# Altium PCB LED Chaser.PcbDoc
Units mm, origin at the board's own origin, x right, y up, seen from the top; angles counter-clockwise.
Board outline 64 x 48.5 mm, 2 copper layers (Top Layer, Bottom Layer), stack 1.1 mm thick; 19 components, 17 nets, 61 pads, 20 vias.
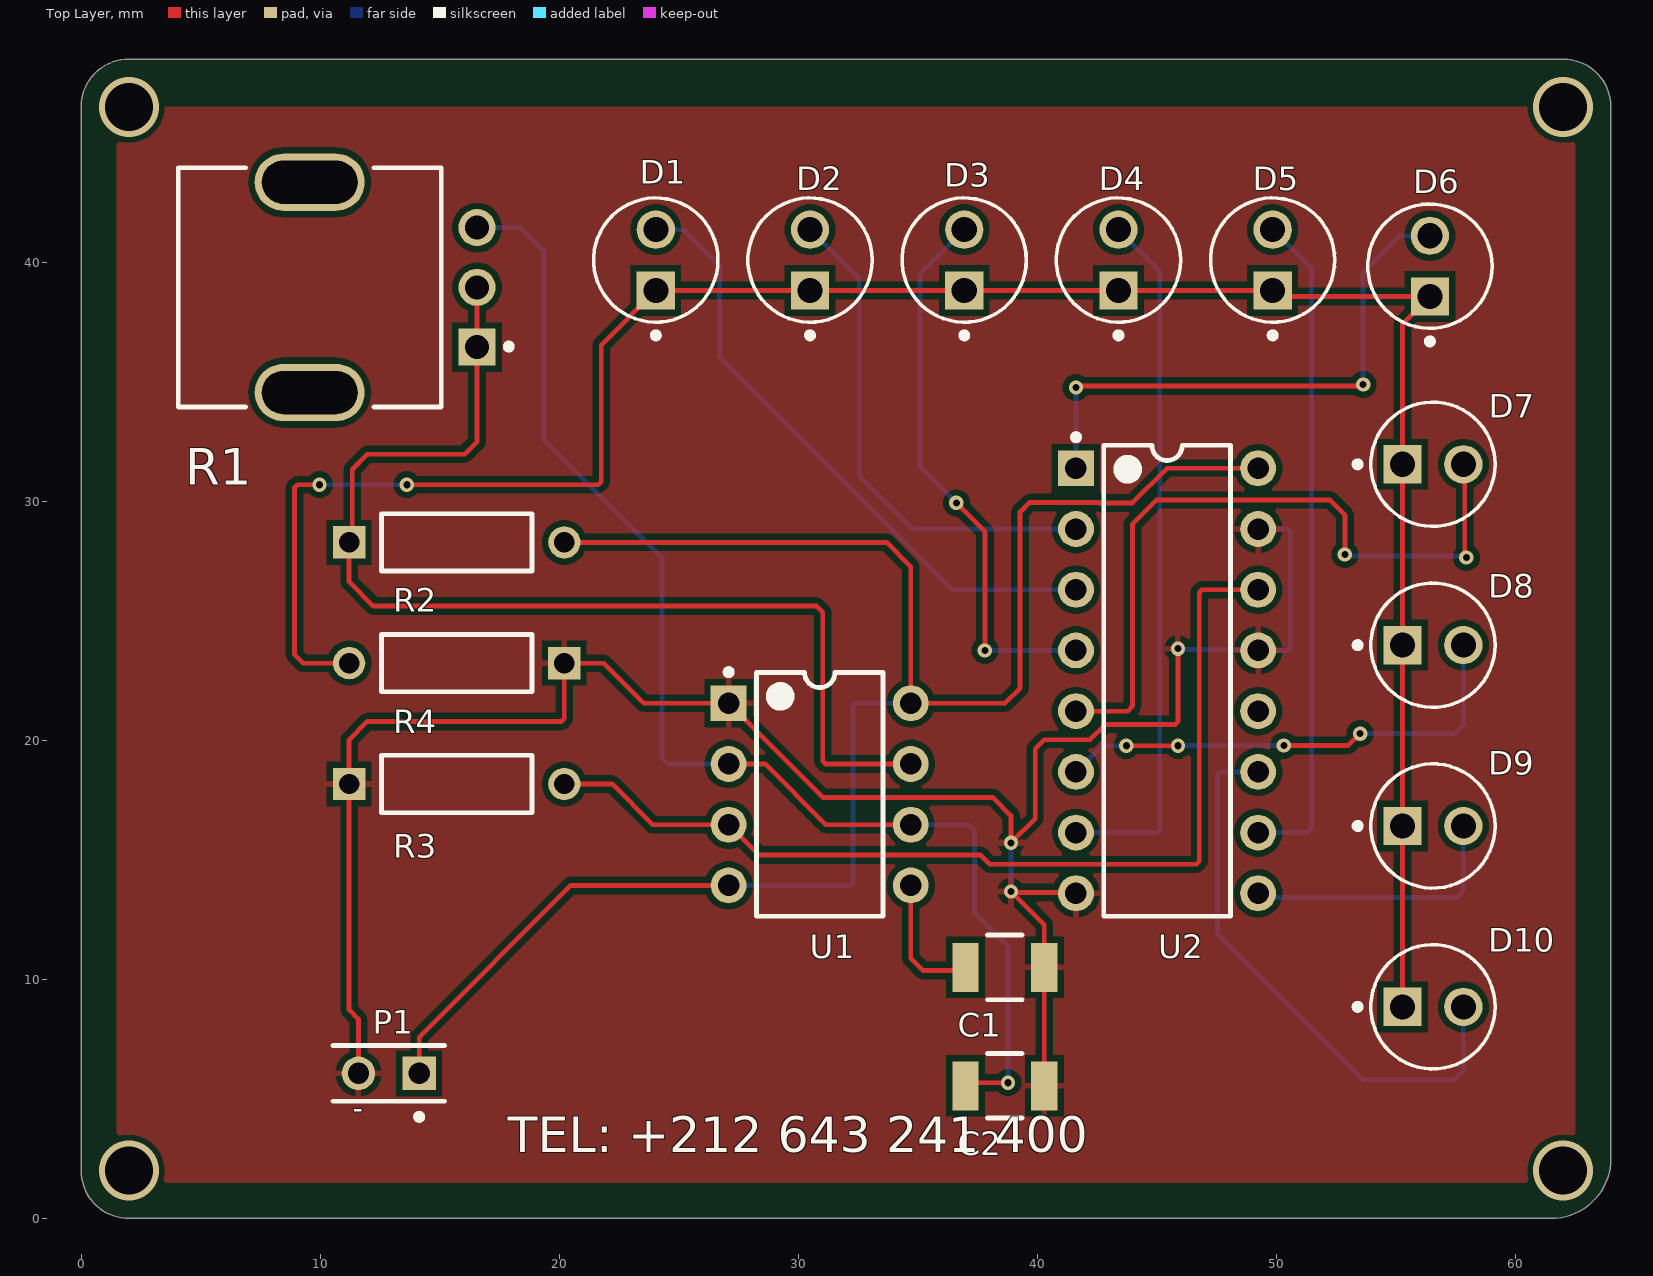
[diagram p0: Top Layer view]
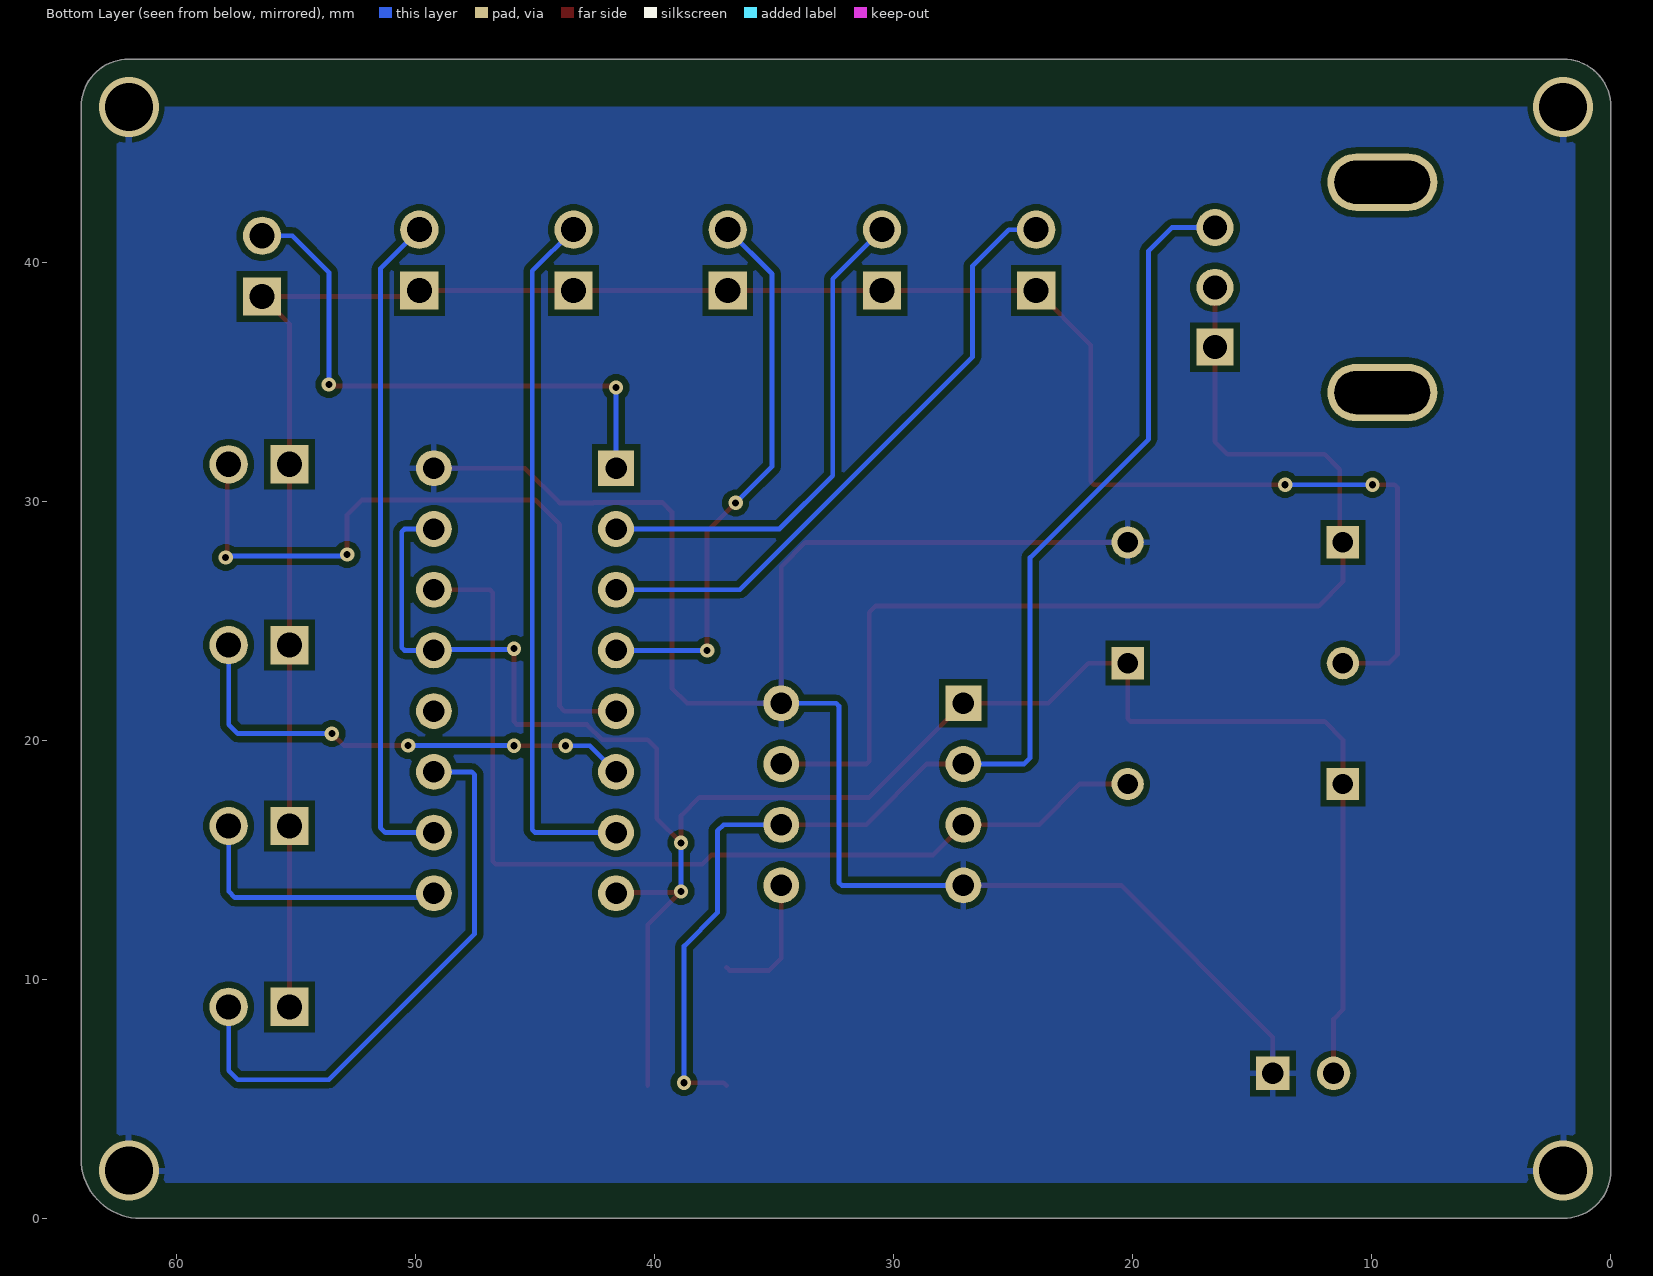
[diagram p1: Bottom Layer view, seen from below]
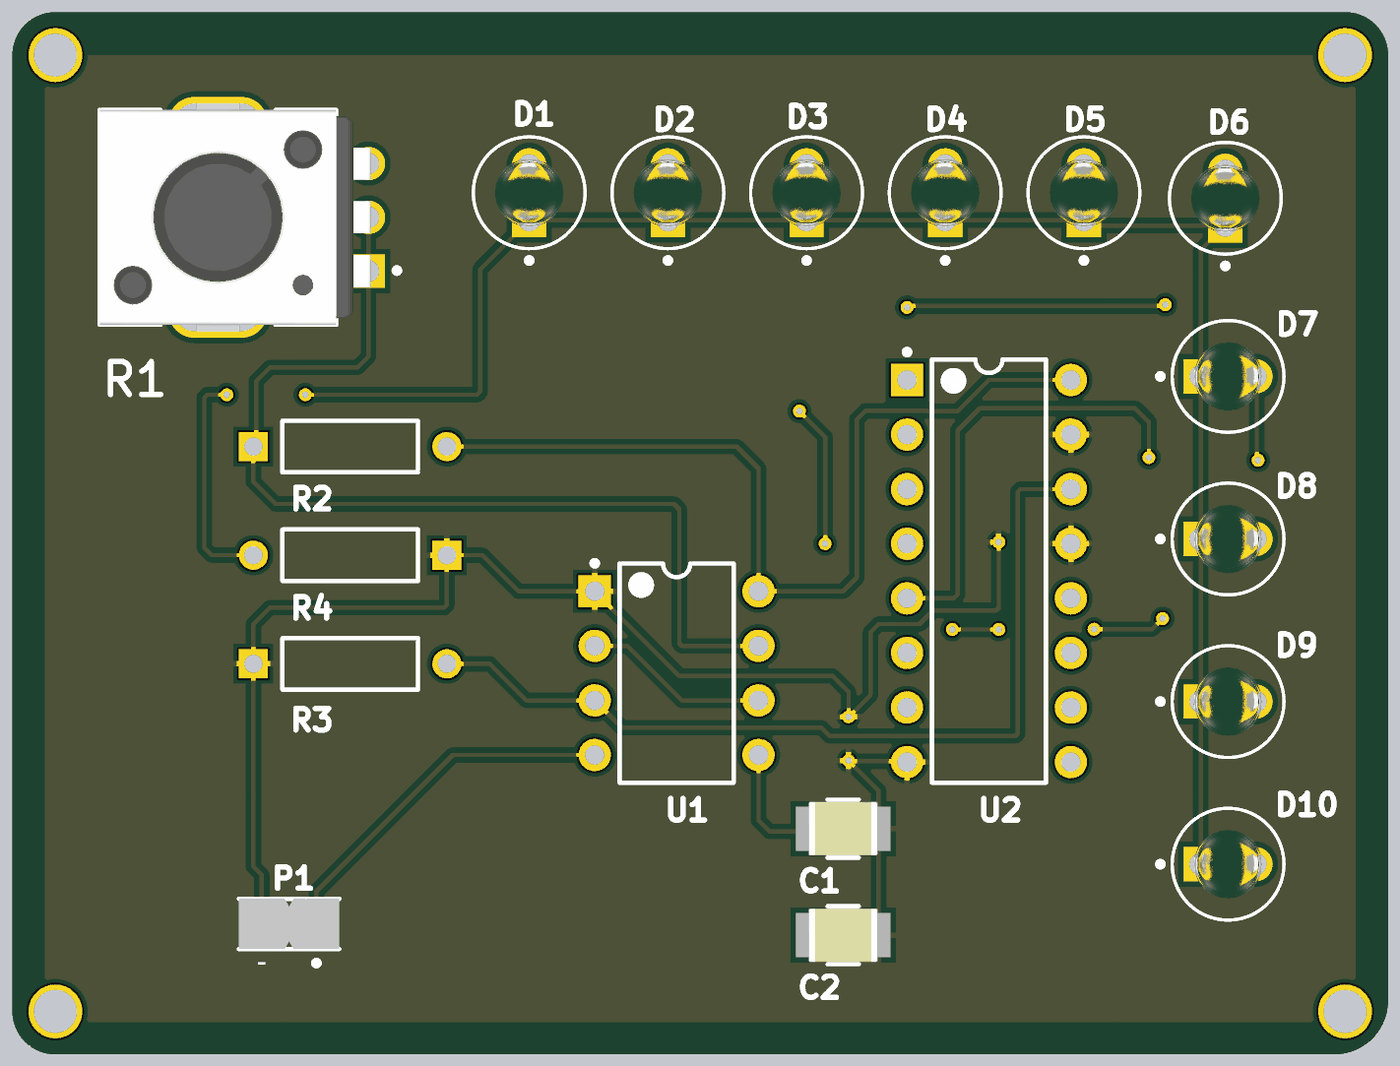
[diagram p2: 3D render of the assembled board from above, using the file's embedded part models]

## Layer stack, top to bottom
Top Solder: solder mask 0.05, SM-002, Dk 4
Top Layer: signal copper 0.1
Dielectric 1: dielectric 0.9, FR-4, Dk 4.8
Bottom Layer: signal copper 0.1
Bottom Solder: solder mask 0.05, SM-002, Dk 4

## Board outline
0,2 0,46.5 cw(c2,46.5) 2,48.5 62,48.5 cw(c62,46.5) 64,46.5 64,2.5 cw(c61.5,2.5) 61.5,0 2,0 cw(c2,2)

## Design rules (kind name [scope] priority, off if disabled: settings)
Clearance [All] p1: gap=0.254 ignorepadtopadclearanceinfootprint=FALSE ismatrix=TRUE
PolygonConnect [All] p1: connectstyle=Relief reliefconductorwidth=0.254 reliefentries=4 polygonreliefangle="90 Angle" airgapwidth=0.254
RoutingVias RoutingViaStyle_1 [All] p1: holewidth=0.4 width=0.5 viastyle="Through Hole" minholewidth=0.4 minwidth=0.5 maxholewidth=0.4 maxwidth=0.5
RoutingVias [All] p2: holewidth=0.711 width=1.27 viastyle="Through Hole" minholewidth=0.711 minwidth=1.27 maxholewidth=0.711 maxwidth=1.27
SolderMaskExpansion [All] p1: expansion=0.102 istentingtop=FALSE
Width PowerWidth [(InNet('VCC') OR InNet('GND'))] p1: maxlimit=0.5 minlimit=0.3 preferedwidth=0.4 minimp=50.000000 maximp=50.000000 favimp=50.000000
Width MaxMinWidth_1 [All] p2: maxlimit=0.2 minlimit=0.1 preferedwidth=0.2 minimp=50.000000 maximp=50.000000 favimp=50.000000
Width [All] p3: maxlimit=0.254 minlimit=0.254 preferedwidth=0.254
30 further rules are at their usual default settings.

## Components (designator, comment, footprint, x,y, rotation, side; value= is the part's Value field where it differs from the comment)
C1 "GRM32ER60J107ME20L" FP-GRM32-0_3-MFG 38.648,5.549 r0 top value=100uF
C2 "GRM32ER60J107ME20L" FP-GRM32-0_3-MFG 38.648,10.502 r0 top value=100uF
D1 "TLHR4400" FP-6_544-5255_01-4-MFG 24.043,40.093 r90 top
D2 "TLHR4400" FP-6_544-5255_01-4-MFG 30.495,40.093 r90 top
D3 "TLHR4400" FP-6_544-5255_01-4-MFG 36.946,40.093 r90 top
D4 "TLHR4400" FP-6_544-5255_01-4-MFG 43.398,40.093 r90 top
D5 "TLHR4400" FP-6_544-5255_01-4-MFG 49.849,40.093 r90 top
D6 "TLHR4400" FP-6_544-5255_01-4-MFG 56.428,39.839 r90 top
D7 "TLHR4400" FP-6_544-5255_01-4-MFG 56.555,31.548 r0 top
D8 "TLHR4400" FP-6_544-5255_01-4-MFG 56.555,23.982 r0 top
D9 "TLHR4400" FP-6_544-5255_01-4-MFG 56.555,16.417 r0 top
D10 "TLHR4400" FP-6_544-5255_01-4-MFG 56.555,8.851 r0 top
P1 "5-146280-2" TECO-5-146280-2_V 12.874,6.069 r180 top
R1 "PTV09A-4225F-B103" FP-PTV09A-4-MFG 9.565,38.95 r90 top
R2 "MFR-25FBF52-1M" RESA60-630X240 15.714,28.282 r0 top
R3 "MFR-25FBF52-1M" RESA60-630X240 15.714,18.175 r0 top
R4 "MFR-25FBF52-1M" RESA60-630X240 15.714,23.228 r180 top
U1 "NE555P" P0008A 30.901,17.741 r0 top
U2 "CD74HC4017E" N0016A 45.432,22.491 r0 top

## Footprints (in the part's own frame and the unit in brackets; to place one, negate y for a bottom-side part, rotate by r counter-clockwise, add the part's x,y. Pads: shape width x height; smd on the part's side, far side on the other; paste and mask are expansions set on the pad)
FP-6_544-5255_01-4-MFG [mm]
  rect 1.6x1.6 hole 1.05 paste-2539.97 mask+0: 1(-1.27,0)
  round 1.6 hole 1.05 paste-2539.97 mask+0: 2(1.27,0)
  silkscreen extent -3.27,-2.6 2.6,2.6, body extent -2.32,-2.32 2.32,2.32, height 0.25
FP-GRM32-0_3-MFG [mm]
  rect 1.1x2.05 smd paste+0 mask+0: 1(-1.65,0) 2(1.65,0)
  silkscreen extent -0.72,-1.35 0.72,1.35, body extent -2.3,-1.45 2.3,1.45, height 0.25
FP-PTV09A-4-MFG [mm]
  rect 1.55x1.55 hole 1 paste-2539.97 mask+0: 1(-2.5,-7)
  round 1.55 hole 1 paste-2539.97 mask+0: 2(0,-7) 3(2.5,-7)
  rrect100% 2.4x4.6 hole 4 slot 1.8 at 0 deg paste-2539.97 mask+0: 4(-4.4,0) 5(4.4,0)
  silkscreen extent -5,-8.45 5,5.5, body extent -5.8,-7.88 5.8,5.6, height 0.25
N0016A [mm] "DIP, 16-Leads, Body 19.7x6.6mm, Pitch 2.54mm"
  rect 1.5x1.5 hole 0.9: 1(-3.81,8.89)
  round 1.5 hole 0.9: 2(-3.81,6.35) 3(-3.81,3.81) 4(-3.81,1.27) 5(-3.81,-1.27) 6(-3.81,-3.81) 7(-3.81,-6.35) 8(-3.81,-8.89) 9(3.81,-8.89) 10(3.81,-6.35) 11(3.81,-3.81) 12(3.81,-1.27) 13(3.81,1.27) 14(3.81,3.81) 15(3.81,6.35) 16(3.81,8.89)
  silkscreen extent -3.93,-9.85 2.65,10.31, body extent -3.95,-9.85 3.95,9.85, height 5.08
P0008A [mm] "DIP, 8-Leads, Body 10.15x6.6mm, Pitch 2.54mm"
  rect 1.5x1.5 hole 0.9: 1(-3.81,3.81)
  round 1.5 hole 0.9: 2(-3.81,1.27) 3(-3.81,-1.27) 4(-3.81,-3.81) 5(3.81,-3.81) 6(3.81,-1.27) 7(3.81,1.27) 8(3.81,3.81)
  silkscreen extent -3.93,-5.1 2.65,5.23, body extent -3.95,-5.07 3.95,5.07, height 5.08
RESA60-630X240 [mm] "Axial Resistor, 2-Leads, Dia 2.4mm, Body Length 6.3mm"
  rect 1.35x1.35 hole 0.85: 1(-4.5,0)
  round 1.35 hole 0.85: 2(4.5,0)
  silkscreen extent -3.15,-1.2 3.15,1.2, body extent -3.15,-1.2 3.15,1.2, height 2.4
TECO-5-146280-2_V [mm] "Connector, 2-Leads, Body 4.67x2.34mm, Pitch 2.54mm"
  rect 1.4x1.4 hole 0.89: 1(-1.27,0)
  round 1.4 hole 0.89: 2(1.27,0)
  silkscreen extent -2.33,-1.17 2.33,1.94, body extent -2.34,-1.17 2.34,1.17, height 5.33

## Part data
C1: library part CMP-2000-05259-2, "CAP CER 100UF 6.3V X5R 1210", 3DS Part Number=220-00002, Capacitance=100uF, Manufacturer=Murata, Package=GRM32-0.3, Temperature="-55°C to +85°C", Temperature Characteristic=X5R, Temperature Coefficient=15%, Temperature Range High=+85°C, Temperature Range Low=-55°C, Tolerance=20%, Voltage=6.3V, Automotive=No, Category=Cap, ComponentLink2Description=Datasheet, ComponentLink2URL=https://search.murata.co.jp/Ceramy/image/img/A01X/G101/ENG/GRM32ER60J107ME20-01.pdf, Device Class L1="Passive Components", Device Class L2=Capacitors, Device Class L3="Ceramic Capacitors", Digikey Description="CAP CER 100UF 6.3V X5R 1210", Height=2.7mm, Ipc Land Pattern Name=CAPC320250X250, Lead Free=Yes, Manufacturer Part Number=GRM32ER60J107ME20L, Material=Ceramic, Octopart=https://octopart.com/grm32er60j107me20l-murata-197007, RoHS=TRUE, Voltage Rating=6.3V
C2: library part CMP-2000-05259-2, "CAP CER 100UF 6.3V X5R 1210", 3DS Part Number=220-00002, Capacitance=10nF, Manufacturer=Murata, Package=GRM32-0.3, Temperature="-55°C to +85°C", Temperature Characteristic=X5R, Temperature Coefficient=15%, Temperature Range High=+85°C, Temperature Range Low=-55°C, Tolerance=20%, Voltage=6.3V, Automotive=No, Category=Cap, ComponentLink2Description=Datasheet, ComponentLink2URL=https://search.murata.co.jp/Ceramy/image/img/A01X/G101/ENG/GRM32ER60J107ME20-01.pdf, Device Class L1="Passive Components", Device Class L2=Capacitors, Device Class L3="Ceramic Capacitors", Digikey Description="CAP CER 100UF 6.3V X5R 1210", Height=2.7mm, Ipc Land Pattern Name=CAPC320250X250, Lead Free=Yes, Manufacturer Part Number=GRM32ER60J107ME20L, Material=Ceramic, Octopart=https://octopart.com/grm32er60j107me20l-murata-197007, RoHS=TRUE, Voltage Rating=6.3V
D1 D2 D3 D4 D5 D6 D7 D8 D9 D10: library part CMP-00030-55433986-1, "TLHR4400 LED; Red; 3mcd; 3mmDia.; T-1; 30mA; 2V; 635nm; +/-30deg; GaAsP on GaP; 15V; 100mW", Case/Package=T, Color=Red, Forward Current=10mA, Forward Voltage=2V, Max Operating Temperature=100°C, Min Operating Temperature=-40°C, Power Dissipation=100mW, Reverse Voltage=15V, Depth=3.2mm, Diameter=3mm, Dominant Wavelength=625nm, Height=6.1mm, Illumination Color=Red, Length=3.2mm, Lens Size=3mm, Lens Style="Circular, Colored, Diffused, Dome, Round", Lens Transparency=Diffused, Luminous Intensity=3mcd, Mount="PCB, Through Hole", NexarPartId=55433986, Number of Elements=1, Number of LEDs=1, Number of Pins=2, Packaging=Bulk, Radiation Hardening=No, REACH SVHC=Unknown, RoHS=Compliant, Schedule B="8541402000, 8541402000", Test Current=10mA, Viewing Angle=30°, Wavelength=625nm
P1: library part CMP-2000-07492-1, "Male Header, Pitch 2.54 mm, 1 x 2 Position, Height 8.21 mm, Tail Length 3.05 mm, -65 to 105 degC, RoHS, Bulk", Case\/Package=100, Colour=Black, Current Rating=3A, Flammability Rating=UL94V-0, High Temperature Housing=Yes, Manufacturer="TE Connectivity", Max Current Rating=5A, Max Operating Temperature=105degC, Min Operating Temperature=-65degC, Package Description="Male Header, Pitch 2.54 mm, 1 x 2 Position, Height 8.21 mm, Tail Length 3.05 mm", Package Quantity=500, Approvals=CSA, Board Standoff=No(Without), Connector Type=Header, Contact Gender=Male, Contact Material=CopperAlloy, Contact Mating Length=0.23inch, Contact Plating=Matte, Contact Protection=No(Without), Contact Shape=Square, Datasheet URL=http://www.te.com/commerce/DocumentDelivery/DDEController?Action=showdoc&DocId=Customer+Drawing%7F146280%7FH1%7Fpdf%7FEnglish%7FENG_CD_146280_H1.pdf%7F5-146280-2, Datasheet Version="Rev. H1, 08/2016", Depth=2.34mm, Gasket=No(Without), High Speed Serial Data Connector=No, Housing Colour=Black, Housing Material=Polymer, Keyed=No, Length=4.67mm, Manufacturer URL=http://www.te.com/, Mating Alignment=No(Without), Mating Connector Lock=No(Without), Mating Post Length=0.23inch, Mount=ThroughHole, Mounting Technology=ThroughHole, Number of Contacts=2, Number of Positions=2, Number of Rows=1, Orientation=Straight, Package Reference=5-146280-2, Packaging=Carton, Panel Mount Retention=No(Without), PCB Mount Retention=Without, PCB Mounting Orientation=Vertical, PCB Thickness=0.063inch, Pitch=2.54mm, Radiation Hardening=No, RoHSCompliant=true, Row Spacing=2.54mm, Selectively Loaded=No(Without), Stabilizers=No(Without), Termination=ThroughHole, Termination Post Length=0.12inch
R1: library part CMP-07234-000052-1, "POT 10K OHM 1/20W CARBON LINEAR", Max Operating Temperature=50°C, Max Power Dissipation=50mW, Min Operating Temperature=-10°C, Package Quantity=100, Resistance=10kR, Resistance Tolerance=20%, Resistor Type=Carbon, Actuator Diameter=0.236inch, Actuator Length=0.984inch, Depth=12.5mm, Height=12.5mm, Hole Diameter=9.1mm, Length=11.4mm, Military Standard=Not, Mount="Through Hole", Number of Gangs=1, Number of Turns=1, Packaging=Bulk, Power Rating=50mW, Radiation Hardening=No, REACH SVHC="No SVHC", RoHS Compliant=Yes, Series="Pro Audio PTV09", Taper=Linear, Technology="CARBON FILM", Termination=PCB, Tolerance=20%, Type=Potentiometer
R2 R3 R4: library part CMP-1659-00070-1, "Axial Resistor, 1 MOhm, +/- 1%, 250 mW, -55 to 155 degC, 2-Pin THD, RoHS, Bulk", Case\Package=Axial, Max Operating Temperature="155 degC", Min Operating Temperature="-55 degC", Package Quantity=200, Power Rating="250 mW", Resistance="1M Ohm", Tolerance=1%, Voltage Rating="250 V", ComponentLink1Description="Manufacturer URL", ComponentLink1URL=http://www.yageo.com/, ComponentLink2Description=Datasheet, ComponentLink2URL=http://www.yageo.com/documents/recent/Yageo%20LR_MFR_2013.pdf, DatasheetVersion=Apr-13, Length="0.248 inch", Mount="Through Hole", PackageDescription="2-Pin Axial Lead, Dia 2.4 mm, Body Length 6.3 mm", PackageReference=MFR-25, Packaging=Bulk, RoHSCompliant=true
U1: library part CMP-2000-04954-1, "Precision Timer, 4.5 to 16 V, 0 to 70 degC, 8-Pin DIP, Pb-Free, Tube", Manufacturer=TexasInstruments, Maximum High Level Output Current=-200mA, Maximum Low Level Output Current=200mA, Operating Supply Voltage=5, Package=8PDIP, Package Description="8-Pin Double In-line Package, Body 9.59 x 6.35 mm, Pitch 2.54 mm", Package Reference=P8, Category=Timer, Datasheet URL=http://www.ti.com/general/docs/lit/getliterature.tsp?genericPartNumber=NE555&fileType=pdf, Datasheet Version="Rev. I, 09/2014", Manufacturer URL=http://www.ti.com/, Number of Internal Timers=1, Package URL=http://www.ti.com/lit/ml/mpdi001b/mpdi001b.pdf, Packaging=Rail/Tube, Rad Hard=No, Type=Standard
U2: library part CMP-1623-00548-2, "High Speed CMOS Logic Decade Counter/Divider with 10 Decoded Outputs, N0016A, TUBE", F @ Nom Voltage(Max)(Mhz)=28, Generic Part Number=CD74HC4017, ICC @ Nom Voltage(Max)(mA)=0.08, Manufacturer="Texas Instruments", Operating Temperature Range(C)="-55 to 125", Rating=Catalog, tpd @ Nom Voltage(Max)(ns)=54, Voltage(Nom)(V)=3.3,5, Bits(#)=10, Code_JEDEC=MS-001, DatasheetVersion=SCHS200D, Function=Counter, Input Type=LVTTL/CMOS, Inputs=1, Output Drive (IOL/IOH)(Max)(mA)=5.2/-5.2, Output Type=CMOS, PackageReference=N0016A, Schmitt Trigger=No, Technology Family=HC, Type=Decade, VCC(Max)(V)=6, VCC(Min)(V)=2

## Via types
v1: diameter 0.6, hole 0.3, Top Layer to Bottom Layer, 16 vias
v2: diameter 2.5, hole 2, Top Layer to Bottom Layer, 4 vias

## Nets (pads, with @x,y where several pads share a name; then routed paths per layer and width w, separated by ;. In a path a pad name is that pad's centre, name@x,y a point inside that pad or via, vN(x,y) a via of type N, cw(c..) or ccw(c..) an arc to the next point about the centre after c; other vN are vias at no path point)
DischNet: R1.1 R1.2 R2.1 U1.7 | length 47.2
  Top Layer w0.2: R1.2 R1.1 16.565,32.488 16.042,31.965 11.978,31.965 11.343,31.33 11.343,28.411 R2.1 11.214,26.633 12.232,25.615 30.774,25.615 31.028,25.361 31.028,19.128 31.145,19.011 U1.7
GndNet: C1.2 C2.2 P1.2 R3.1 R4.1 U1.1 U2.8 U2.13 U2.15 | length 86.6
  Top Layer w0.2: P1.2 11.604,8.336 11.214,8.726 R3.1 11.214,20.025 11.978,20.789 20.096,20.789 20.214,20.906 R4.1 21.858,23.228 23.535,21.551 U1.1 31.028,17.614 38.14,17.614 38.902,16.852 v1(38.902,15.709) 39.918,16.725 39.918,19.646 40.299,20.027 42.204,20.027 42.839,20.662 45.77,20.662 45.887,20.779 v1(45.887,23.837) ; v1(38.902,13.677) v1@38.94,13.639 ; C1.2 C2.2 40.298,12.281 v1@38.94,13.639 ; U2.8 41.584,13.639 v1@38.94,13.639
  Bottom Layer w0.2: v1(38.902,13.677) v1(38.902,15.709) ; v1(45.887,23.837) 45.925,23.799 49.204,23.799 U2.13 50.469,23.761 50.586,23.878 50.586,28.724 50.469,28.841 U2.15
NetC1_1: C1.1 R1.3 U1.2 U1.6 | length 53.7
  Top Layer w0.2: U1.2 28.615,19.011 31.155,16.471 U1.6 ; C1.1 37.125,5.676 v1(38.775,5.676)
  Bottom Layer w0.2: R1.3 18.368,41.45 19.344,40.474 19.344,32.6 24.297,27.647 24.297,19.265 24.551,19.011 U1.2 ; U1.6 37.124,16.471 37.378,16.217 37.378,12.788 38.775,11.391 v1(38.775,5.676)
NetC2_1: C2.1 U1.5 | length 5.6
  Top Layer w0.2: U1.5 34.711,10.883 35.219,10.375 36.871,10.375 C2.1
NetD1_1: D1.1 D2.1 D3.1 D4.1 D5.1 D6.1 D7.1 D8.1 D9.1 D10.1 R4.2 | length 94
  Top Layer w0.2: v1(9.975,30.695) 9.047,30.695 8.93,30.578 8.93,23.583 9.285,23.228 R4.2 ; v1(13.629,30.695) 21.63,30.695 21.757,30.822 21.757,36.537 D1.1 D2.1 D3.1 D4.1 D5.1 50.103,38.569 D6.1 55.285,37.426 D7.1 D8.1 D9.1 D10.1
  Bottom Layer w0.2: v1(9.975,30.695) v1(13.629,30.695)
NetD1_2: D1.2 U2.3 | length 26
  Bottom Layer w0.2: D1.2 25.186,41.363 26.71,39.839 26.71,36.029 36.438,26.301 U2.3
NetD2_2: D2.2 U2.2 | length 21.1
  Bottom Layer w0.2: D2.2 32.552,39.306 32.552,31.076 34.787,28.841 U2.2
NetD3_2: D3.2 U2.4 | length 23.3
  Top Layer w0.2: v1(36.616,29.933) 37.81,28.739 v1(37.81,23.761)
  Bottom Layer w0.2: v1(36.616,29.933) 35.092,31.457 35.092,39.509 D3.2 ; v1(37.81,23.761) U2.4
NetD4_2: D4.2 U2.7 | length 29.4
  Bottom Layer w0.2: U2.7 45.008,16.141 45.125,16.258 45.125,39.636 D4.2
NetD5_2: D5.2 U2.10 | length 28
  Bottom Layer w0.2: U2.10 51.272,16.141 51.475,16.344 51.475,39.737 D5.2
NetD6_2: D6.2 U2.1 | length 23.6
  Top Layer w0.2: v1(41.622,34.759) 41.685,34.823 53.57,34.823 v1(53.634,34.886)
  Bottom Layer w0.2: U2.1 v1(41.622,34.759) ; v1(53.634,34.886) 53.634,39.585 55.158,41.109 D6.2
NetD7_2: D7.2 U2.5 | length 30.4
  Top Layer w0.2: U2.5 43.779,21.221 43.982,21.424 43.982,29.044 44.998,30.06 52.247,30.06 52.872,29.435 v1(52.872,27.774) ; D7.2 57.888,31.485 57.888,27.711 v1(57.952,27.647)
  Bottom Layer w0.2: v1(52.872,27.774) 52.935,27.711 57.888,27.711 v1(57.952,27.647)
NetD8_2: D8.2 U2.6 | length 20.4
  Top Layer w0.2: v1(43.728,19.773) v1(45.887,19.773) ; v1(50.32,19.785) 53.011,19.785 v1(53.507,20.281)
  Bottom Layer w0.2: U2.6 42.714,19.773 v1(43.728,19.773) ; v1(45.887,19.773) 45.899,19.785 v1(50.32,19.785) v1@50.332,19.773 ; v1(53.507,20.281) 57.444,20.281 57.825,20.662 D8.2
NetD9_2: D9.2 U2.9 | length 11.5
  Bottom Layer w0.2: U2.9 49.42,13.423 57.571,13.423 57.825,13.677 D9.2
NetD10_2: D10.2 U2.11 | length 24.1
  Bottom Layer w0.2: U2.11 47.655,18.681 47.538,18.564 47.538,11.899 53.634,5.803 57.444,5.803 57.825,6.184 D10.2
NetR3_2: R3.2 U1.3 U2.14 | length 41.8
  Top Layer w0.2: R3.2 22.212,18.175 23.916,16.471 U1.3 28.361,15.201 37.632,15.201 38.013,14.82 46.659,14.82 46.776,14.937 46.776,26.184 46.893,26.301 U2.14
PowerNet: P1.1 R2.2 U1.4 U1.8 U2.16 | length 75.8
  Top Layer w0.2: P1.1 14.144,7.588 20.487,13.931 U1.4 ; R2.2 33.695,28.282 34.711,27.266 U1.8 38.648,21.551 39.283,22.186 39.283,29.552 39.676,29.945 42.567,29.945 42.579,29.933 43.982,29.933 45.43,31.381 U2.16
  Bottom Layer w0.2: U1.4 32.181,13.931 32.298,14.048 32.298,21.434 32.415,21.551 U1.8
  other v2: 2,2 62,2 2,46.5 62,46.5
pads on no net: R1.4 R1.5 U2.12

## Polygon pours and split planes (outlines as drawn)
GndNet on Top Layer "GndNet" (solid, pour order 0): 1.5,47 2,46.5 62.5,46.5 62.5,1.5 1.5,1.5 1.5,46.5 2,46.5
PowerNet on Bottom Layer "PowerNet" (solid, pour order 1): 1.5,46.5 62.5,46.5 62.5,1.5 1.5,1.5

## Silkscreen, mask and mechanical layers (free items; w line width, h text height)
Top Overlay:
  text "-" at 11.375,3.887 h1.5
  text "TEL: +212 643 241 400" at 17.85,2.775 h1.5